# EAGLE board Demux (2) (EAGLE 7.7.0)
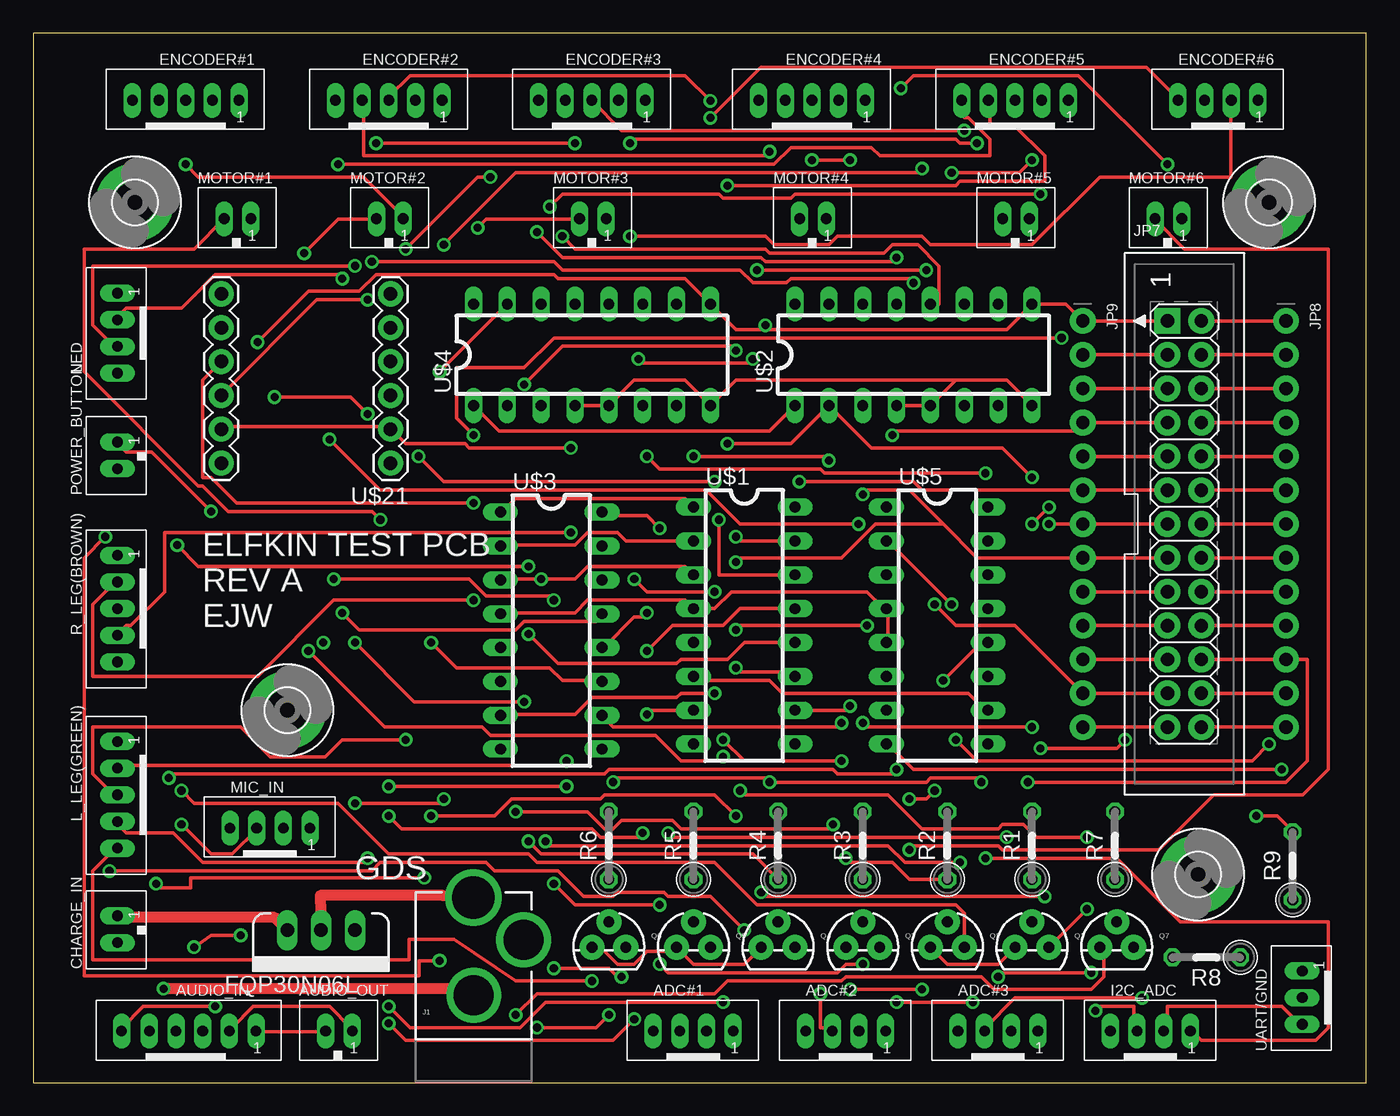
[diagram p0: board, top side]
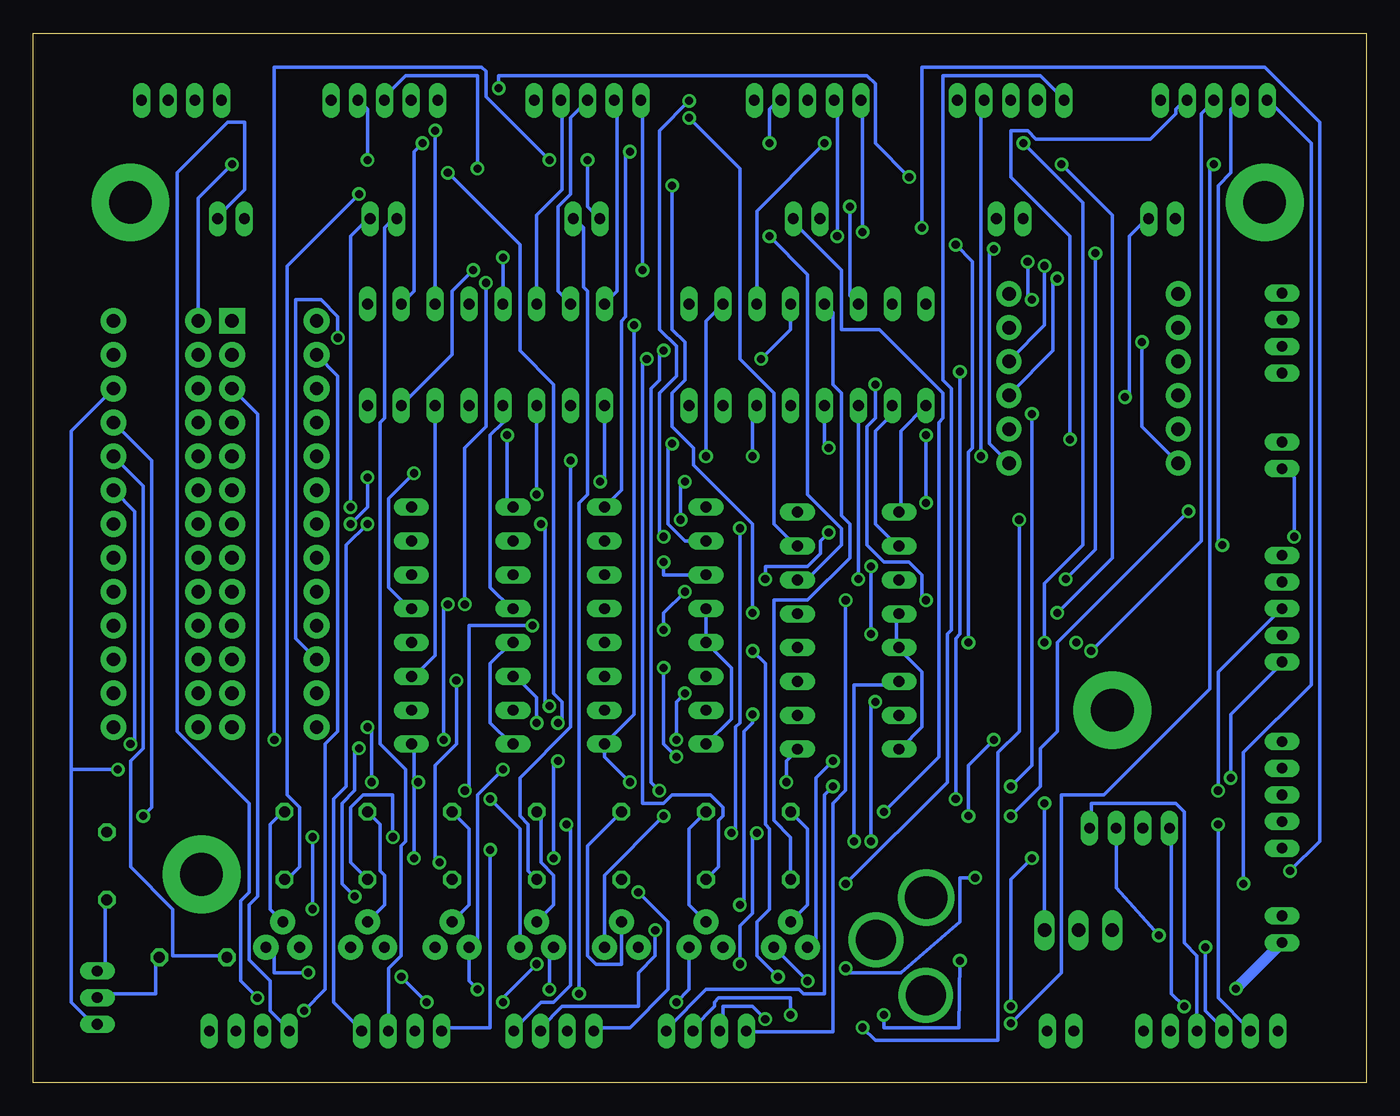
[diagram p1: board, bottom side, seen from below]

Size 100 x 78.73 mm. Coordinates in mm from the lower left corner, seen from the top.
Outline: 0,0 100,0 100,78.73 0,78.73 0,0
Copper layers (1*16): Top 0.035mm / dielectric 1.5mm / Bottom 0.035mm
Design rules "default *": minimum track width 10mil, minimum drill 24mil, track to track 8mil, track to pad 8mil, pad to pad 8mil, via to via 8mil, smd to smd 8mil, copper to edge 80mil, drill to drill 8mil, minimum pad ring 10mil, minimum via ring 8mil, stop-mask expansion 4mil, vias tented up to drill 0mil, thermal gap 10mil

## Footprints (pad centres in the part's own frame; a part is rotated, then mirrored left to right if it is on the bottom)
JST_B4B-PH_HEADER = drill 0.8 long: P1 2.98,0.048; P2 0.98,0.048; P3 -1.02,0.048; P4 -3.02,0.048
JST_B6B-PH_HEADER = drill 0.8 long: P1 4,0.048; P2 2,0.048; P3 0,0.048; P4 -2,0.048; P5 -4,0.048; P6 -6.076,0.048
JST_B2B-PH_HEADER = drill 0.8 long: P1 1.075,0.048; P2 -0.925,0.048
JST_B5B-PH_HEADER = drill 0.8 long: P1 4,0.048; P2 2,0.048; P3 0,0.048; P4 -2,0.048; P5 -4,0.048
TO220V = drill 1.016 long: 1 -2.54,0; 2 0,0; 3 2.54,0
3,2-PAD = drill 3.2 pad 5.842: B3,2 0,0
POWER_JACK_PTH_LOCK = drill 2.997 pad 4.115: GND 0.025,6.557; GNDBREAK 3.762,10.7 | drill 3.2 pad 4.115: PWR 0,13.878
RASBERRYPI_IDC = drill 1 pad 1.93 square: 1 -1.27,15.24 | drill 1 pad 1.93: 2 1.27,15.24; 3 -1.27,12.7; 4 1.27,12.7; 5 -1.27,10.16; 6 1.27,10.16; 7 -1.27,7.62; 8 1.27,7.62; 9 -1.27,5.08; 10 1.27,5.08; 11 -1.27,2.54; 12 1.27,2.54; 13 -1.27,0; 14 1.27,0; 15 -1.27,-2.54; 16 1.27,-2.54; 17 -1.27,-5.08; 18 1.27,-5.08; 19 -1.27,-7.62; 20 1.27,-7.62; 21 -1.27,-10.16; 22 1.27,-10.16; 23 -1.27,-12.7; 24 1.27,-12.7; 25 -1.27,-15.24; 26 1.27,-15.24
1X13_ROUND_76MIL = drill 1 pad 1.93: 1 -15.24,0; 2 -12.7,0; 3 -10.16,0; 4 -7.62,0; 5 -5.08,0; 6 -2.54,0; 7 0,0; 8 2.54,0; 9 5.08,0; 10 7.62,0; 11 10.16,0; 12 12.7,0; 13 15.24,0
TO-92 = drill 0.813 pad 1.88: 1 -1.27,0; 2 0,1.905; 3 1.27,0
0207/5V = drill 0.813 octagon: 1 -2.54,0; 2 2.54,0
DIL16 = drill 0.813 long: 1 -8.89,-3.81; 2 -6.35,-3.81; 3 -3.81,-3.81; 4 -1.27,-3.81; 5 1.27,-3.81; 6 3.81,-3.81; 7 6.35,-3.81; 8 8.89,-3.81; 9 8.89,3.81; 10 6.35,3.81; 11 3.81,3.81; 12 1.27,3.81; 13 -1.27,3.81; 14 -3.81,3.81; 15 -6.35,3.81; 16 -8.89,3.81
LEVEL_SHIFTER = drill 1.016 pad 1.88: 1 6.35,7.62; 2 6.35,5.08; 3 6.35,2.54; 4 6.35,0; 5 6.35,-2.54; 6 6.35,-5.08; 7 -6.35,7.62; 8 -6.35,5.08; 9 -6.35,2.54; 10 -6.35,0; 11 -6.35,-2.54; 12 -6.35,-5.08
JST_B3B-PH_HEADER = drill 0.8 long: P1 2.027,0.048; P2 0.028,0.048; P3 -1.972,0.048

## Placement (x,y rotation side)
ADC#1  JST-PH_4-PIN_HEADER  [JST_B4B-PH_HEADER]  49.53,3.81 0 top
ADC#2  JST-PH_4-PIN_HEADER  [JST_B4B-PH_HEADER]  60.96,3.81 0 top
ADC#3  JST-PH_4-PIN_HEADER  [JST_B4B-PH_HEADER]  72.39,3.81 0 top
AUDIO_IN  JST-PH-6-PIN_HEADERJST_B6B-PH_HEADER  [JST_B6B-PH_HEADER]  12.7,3.81 0 top
AUDIO_OUT  JST-PH_2-PIN_HEADER  [JST_B2B-PH_HEADER]  22.86,3.81 0 top
CHARGE_IN  JST-PH_2-PIN_HEADER  [JST_B2B-PH_HEADER]  6.35,11.43 90 top
ENCODER#1  JST-PH_5-PIN_HEADER  [JST_B5B-PH_HEADER]  11.43,73.66 0 top
ENCODER#2  JST-PH_5-PIN_HEADER  [JST_B5B-PH_HEADER]  26.67,73.66 0 top
ENCODER#3  JST-PH_5-PIN_HEADER  [JST_B5B-PH_HEADER]  41.91,73.66 0 top
ENCODER#4  JST-PH_5-PIN_HEADER  [JST_B5B-PH_HEADER]  58.42,73.66 0 top
ENCODER#5  JST-PH_5-PIN_HEADER  [JST_B5B-PH_HEADER]  73.66,73.66 0 top
ENCODER#6  JST-PH_4-PIN_HEADER  [JST_B4B-PH_HEADER]  88.9,73.66 0 top
FQP30N06L  MOSFET-NCHANNELFQP30N06L  [TO220V]  21.59,11.43 180 top
FRAME1  FRAME-LETTER  [CREATIVE_COMMONS]  -101.6,0 0 top  (outside the outline)
H1  MOUNT-PAD-ROUND3.2  [3,2-PAD]  19.05,27.94 0 top
H2  MOUNT-PAD-ROUND3.2  [3,2-PAD]  87.38,15.62 0 top
H3  MOUNT-PAD-ROUND3.2  [3,2-PAD]  7.62,66.04 0 top
H4  MOUNT-PAD-ROUND3.2  [3,2-PAD]  92.71,66.04 0 top
I2C_ADC  JST-PH_4-PIN_HEADER  [JST_B4B-PH_HEADER]  83.82,3.81 0 top
J1  POWER_JACKPTH_LOCK  [POWER_JACK_PTH_LOCK]  33.02,0 0 top
JP7  PI  [RASBERRYPI_IDC]  86.36,41.91 0 top
JP8  Right  [1X13_ROUND_76MIL]  93.98,41.91 270 top
JP9  Left  [1X13_ROUND_76MIL]  78.74,41.91 270 top
L_LEG(GREEN)  JST-PH_5-PIN_HEADER  [JST_B5B-PH_HEADER]  6.35,21.59 90 top
LED  JST-PH_4-PIN_HEADER  [JST_B4B-PH_HEADER]  6.35,56.26 90 top
MIC_IN  JST-PH_4-PIN_HEADER  [JST_B4B-PH_HEADER]  17.78,19.05 0 top
MOTOR#1  JST-PH_2-PIN_HEADER  [JST_B2B-PH_HEADER]  15.24,64.77 0 top
MOTOR#2  JST-PH_2-PIN_HEADER  [JST_B2B-PH_HEADER]  26.67,64.77 0 top
MOTOR#3  JST-PH_2-PIN_HEADER  [JST_B2B-PH_HEADER]  41.91,64.77 0 top
MOTOR#4  JST-PH_2-PIN_HEADER  [JST_B2B-PH_HEADER]  58.42,64.77 0 top
MOTOR#5  JST-PH_2-PIN_HEADER  [JST_B2B-PH_HEADER]  73.66,64.77 0 top
MOTOR#6  JST-PH_2-PIN_HEADER  [JST_B2B-PH_HEADER]  85.09,64.77 0 top
POWER_BUTTON  JST-PH_2-PIN_HEADER  [JST_B2B-PH_HEADER]  6.35,46.99 90 top
Q1  [TO-92]  74.93,10.16 0 top
Q2  [TO-92]  68.58,10.16 0 top
Q3  [TO-92]  62.23,10.16 0 top
Q4  [TO-92]  55.88,10.16 0 top
Q5  [TO-92]  49.53,10.16 0 top
Q6  [TO-92]  43.18,10.16 0 top
Q7  [TO-92]  81.28,10.16 0 top
R1  1k  [0207/5V]  74.93,17.78 90 top
R2  1k  [0207/5V]  68.58,17.78 90 top
R3  1k  [0207/5V]  62.23,17.78 90 top
R4  1k  [0207/5V]  55.88,17.78 90 top
R5  1k  [0207/5V]  49.53,17.78 90 top
R6  1k  [0207/5V]  43.18,17.78 90 top
R7  [0207/5V]  81.15,17.78 90 top
R8  2.2k  [0207/5V]  88.01,9.4 180 top
R9  2.2k  [0207/5V]  94.49,16.26 90 top
R_LEG(BROWN)  JST-PH_5-PIN_HEADER  [JST_B5B-PH_HEADER]  6.35,35.56 90 top
U$1  74LVC138ADDIL16  [DIL16]  53.34,34.29 270 top
U$2  74LVC138ADDIL16  [DIL16]  66.04,54.61 0 top
U$3  74LVC138ADDIL16  [DIL16]  38.86,33.91 270 top
U$4  74LVC138ADDIL16  [DIL16]  41.91,54.61 0 top
U$5  74LVC138ADDIL16  [DIL16]  67.82,34.29 270 top
U$21  LEVEL_SHIFTER  [LEVEL_SHIFTER]  20.45,54.1 180 top
UART/GND  JST-PH_3-PIN_HEADER  [JST_B3B-PH_HEADER]  95.25,6.35 90 top

## Library data of the parts
ADC#1-ADC#3 AUDIO_OUT CHARGE_IN ENCODER#1-ENCODER#6 I2C_ADC L_LEG(GREEN) LED MIC_IN MOTOR#1-MOTOR#6 POWER_BUTTON R_LEG(BROWN) UART/GND = SRG
AUDIO_IN = JST_Connectors
FQP30N06L = SparkFun-DiscreteSemi; PROD_ID: TRANS-10060
FRAME1 = SparkFun-Aesthetics
H1-H4 = holes
J1 = SparkFun-Connectors; PROD_ID: CONN-08197; SF_ID: PRT-00119
JP7-JP9 = microbuilder
Q1-Q7 = SparkFun-DiscreteSemi; PROD_ID: TRANS-08447
R1-R9 = resistor
U$1-U$5 = SparkFun-DigitalIC
U$21 = SparkFun-Connectors

## Nets
3.3V: I2C_ADC.P1 JP7.1 JP9.1 U$1.9 U$2.9 U$3.9 U$4.9 U$5.9 U$21.1
5.0V: JP7.2 JP8.1 U$21.7
GND: I2C_ADC.P2 JP7.6 JP8.3 U$1.4 U$1.5 U$1.8 U$2.4 U$2.5 U$2.8 U$3.4 U$3.5 U$3.8 U$4.4 U$4.5 U$4.8 U$5.4 U$5.5 U$5.8 U$21.2 U$21.8 UART/GND.P3
N$1: JP7.11 JP9.6 U$1.1 U$2.1 U$3.1 U$4.1
N$2: JP7.13 JP9.7 U$1.2 U$2.2 U$3.2 U$4.2
N$3: JP7.15 JP9.8 U$1.3 U$2.3 U$3.3 U$4.3
N$4: ENCODER#1.P2 U$1.10
N$5: ENCODER#1.P3 U$1.11
N$6: ENCODER#1.P4 U$1.12
N$7: ENCODER#1.P5 U$1.13
N$8: ENCODER#2.P2 U$1.14
N$9: ENCODER#2.P3 U$1.15
N$10: ENCODER#2.P4 U$1.16
N$11: ENCODER#2.P5 U$1.7
N$12: ENCODER#3.P2 U$2.10
N$13: ENCODER#3.P3 U$2.11
N$14: ENCODER#3.P4 U$2.12
N$15: ENCODER#3.P5 U$2.13
N$16: ENCODER#4.P2 U$2.14
N$17: ENCODER#4.P3 U$2.15
N$18: ENCODER#4.P4 U$2.16
N$19: ENCODER#4.P5 U$2.7
N$20: ENCODER#5.P2 U$3.10
N$21: ENCODER#5.P3 U$3.11
N$22: ENCODER#5.P4 U$3.12
N$23: ENCODER#5.P5 U$3.13
N$24: ENCODER#6.P2 U$3.14
N$25: ENCODER#6.P4 U$3.15
N$26: R2.1 U$3.7
N$27: ADC#1.P1 MOTOR#1.P1
N$28: ADC#1.P2 MOTOR#1.P2
N$29: ADC#1.P3 MOTOR#2.P1
N$30: ADC#1.P4 MOTOR#2.P2
N$31: ADC#2.P1 MOTOR#3.P1
N$32: ADC#2.P2 MOTOR#3.P2
N$33: ADC#2.P3 MOTOR#4.P1
N$34: ADC#2.P4 MOTOR#4.P2
N$35: ADC#3.P1 MOTOR#5.P1
N$36: ADC#3.P2 MOTOR#5.P2
N$37: ADC#3.P3 MOTOR#6.P1
N$38: ADC#3.P4 MOTOR#6.P2
N$39: Q1.2 R1.2
N$40: Q3.2 R3.2
N$41: Q2.2 R2.2
N$42: Q4.2 R4.2
N$43: Q5.2 R5.2
N$44: Q6.2 R6.2
N$45: R1.1 U$3.16
N$46: R3.1 U$4.10
N$47: R4.1 U$4.11
N$48: R5.1 U$4.12
N$49: Q1.1 Q2.1 Q3.1 R_LEG(BROWN).P5
N$50: R6.1 U$4.13
N$51: AUDIO_IN.P3 MIC_IN.P1
N$52: I2C_ADC.P4 JP7.5 JP9.3
N$53: JP7.7 JP9.4 U$5.1
N$54: JP7.9 JP9.5
N$55: L_LEG(GREEN).P2 Q4.1 Q5.1 Q6.1
N$56: L_LEG(GREEN).P3 Q4.3
N$57: Q1.3 R_LEG(BROWN).P2
N$58: JP7.17 JP9.9
N$59: JP7.19 JP9.10
N$60: JP7.18 JP8.9
N$61: JP7.23 JP9.12 U$21.3
N$62: JP7.25 JP9.13
N$63: JP7.4 JP8.2
N$64: Q2.3 R_LEG(BROWN).P3
N$65: JP7.10 JP8.5 R8.2
N$66: JP7.12 JP8.6 U$5.2
N$67: JP7.14 JP8.7
N$68: JP7.16 JP8.8
N$70: JP7.20 JP8.10
N$71: JP7.22 JP8.11 U$5.6
N$72: JP7.24 JP8.12
N$73: JP7.26 JP8.13
N$74: L_LEG(GREEN).P4 Q5.3
N$75: L_LEG(GREEN).P5 Q6.3
N$76: I2C_ADC.P3 JP7.3 JP9.2
N$77: AUDIO_IN.P4 MIC_IN.P2
N$78: Q7.2 R7.2
N$79: POWER_BUTTON.P1 Q7.3
N$80: POWER_BUTTON.P2 Q7.1
N$81: R7.1 U$4.14
N$82: CHARGE_IN.P2 J1.GND
N$83: FQP30N06L.2 J1.PWR
N$84: FQP30N06L.1 U$4.15
N$85: AUDIO_IN.P2 AUDIO_OUT.P1
N$86: AUDIO_IN.P1 AUDIO_OUT.P2
N$87: U$1.6 U$5.10
N$88: U$2.6 U$5.11
N$89: U$3.6 U$5.12
N$90: Q3.3 R_LEG(BROWN).P4
N$91: U$4.6 U$5.13
N$92: JP7.8 JP8.4 R9.2
N$93: AUDIO_IN.P5 MIC_IN.P3
N$94: AUDIO_IN.P6 MIC_IN.P4
N$95: LED.P2 U$21.9
N$96: LED.P3 U$21.10
N$97: R8.1 UART/GND.P2
N$98: R9.1 UART/GND.P1
N$100: JP7.21 JP9.11 U$21.4
V_IN+: CHARGE_IN.P1 FQP30N06L.3

## Tracks (layer width: path | path; a pad name or v marks a point on that pad's centre or on a via)
3.3V  (via drill 0.61)
  Top 0.254: v43.5,22.54 43.81,22.86 54.93,22.86 v55.24,22.54 66.99,22.54 67.31,22.86 70.8,22.86 v71.12,22.54 | v71.44,16.83 81.28,16.83 86.04,12.07 97.16,12.07 97.16,4.13 96.2,3.18 87.63,3.18 87,3.81 I2C_ADC.P1 | 54.93,56.51 73.03,56.51 U$2.9 77.47,58.42 JP9.1 JP7.1 | 54.93,56.51 52.7,56.51 U$4.9 48.9,60.32 39.37,60.32 39.05,60.64 25.72,60.64 24.45,59.37 20.64,59.37 v16.83,55.56 | 54.93,56.51 v54.93,56.83
  Bottom 0.254: v43.5,22.54 43.5,24.13 42.86,24.77 U$3.9 | v55.24,22.54 57.15,24.45 U$1.9 54.93,27.62 v54.93,56.83 | 71.44,22.54 71.44,25.4 U$5.9 | 71.44,22.54 v71.44,16.83 | 71.44,22.54 v71.12,22.54 | U$21.1 16.83,49.21 v16.83,55.56
5.0V  (via drill 0.61)
  Top 0.254: v27.94,62.55 33.34,67.95 v34.29,67.95 | v65.09,74.61 66.04,75.56 78.42,75.56 v85.09,68.9 | JP7.2 JP8.1
  Bottom 0.254: U$21.7 28.26,47.94 28.26,62.23 v27.94,62.55 | v34.29,67.95 36.83,70.48 36.83,74.93 37.47,75.56 65.09,75.56 v65.09,74.61 | v85.09,68.9 87.63,66.36 JP7.2
GND  (via drill 0.61)
  Top 0.254: JP8.3 JP7.6 | I2C_ADC.P2 85.09,4.13 85.09,5.71 93.66,5.71 94.93,4.45 UART/GND.P3 | U$5.5 64.14,33.02 64.14,35.56 U$5.4 63.82,35.56 62.55,36.83 52.39,36.83 51.12,35.56 U$1.4 48.9,36.2 41.59,36.2 40.64,35.24 35.24,35.24 U$3.4 | U$21.2 14.29,49.21 26.67,49.21 U$21.8 26.99,48.89 27.94,47.94 32.38,47.94 32.7,47.62 v40.32,47.62 | U$4.4 U$4.5 45.09,52.7 48.9,52.7 U$4.8 52.7,52.7 69.22,52.7 | U$2.4 U$2.5 69.22,52.7 | U$2.8 73.03,52.7 69.22,52.7 | v93.66,23.5 66.04,23.5 64.14,25.4 U$5.8
  Bottom 0.254: JP8.3 97.16,48.89 97.16,23.5 | 97.16,23.5 97.16,6.03 95.25,4.13 UART/GND.P3 | U$5.8 64.14,25.4 65.72,26.99 65.72,31.43 64.14,33.02 U$5.5 | U$3.8 34.92,25.08 33.34,26.67 33.34,30.8 34.92,32.38 U$3.5 35.24,32.7 35.24,34.92 U$3.4 | U$1.8 47.62,27.3 47.62,31.11 U$1.5 U$1.4 | v40.32,47.62 40.64,47.94 U$4.4 | U$2.4 64.77,49.53 65.72,48.58 65.72,37.15 64.14,35.56 U$5.4 | v93.66,23.5 97.16,23.5
N$1  (via drill 0.61)
  Top 0.254: JP7.11 JP9.6 66.67,44.45 66.04,45.08 v57.47,45.08 | U$1.1 48.9,43.81 36.2,43.81 35.24,42.86 U$3.1 | U$2.1 55.24,48.89 34.92,48.89 U$4.1
  Bottom 0.254: U$4.1 34.92,48.89 34.92,42.86 U$3.1 | v57.47,45.08 57.15,45.4 U$2.1
N$2  (via drill 0.61)
  Top 0.254: JP7.13 JP9.7 v76.2,41.91 | U$1.2 44.45,40.64 43.81,41.27 41.59,41.27 40.64,40.32 35.24,40.32 U$3.2 | v52.07,47.94 56.83,47.94 U$2.2 62.87,47.62 72.71,47.62 v74.93,45.4
  Bottom 0.254: U$4.2 35.56,50.16 36.83,48.89 36.83,41.91 35.24,40.32 U$3.2 | v52.07,47.94 52.39,47.62 52.39,41.91 51.12,40.64 U$1.2 | v76.2,41.91 74.93,43.18 v74.93,45.4
N$3  (via drill 0.61)
  Top 0.254: U$1.3 48.9,38.73 41.59,38.73 40.64,37.78 v38.1,37.78 35.24,37.78 U$3.3 | v62.23,44.13 62.55,44.45 65.72,44.45 68.26,41.91 | 68.26,41.91 70.8,39.37 JP9.8 JP7.15 | v52.7,39.05 53.02,39.37 60.64,39.37 63.18,41.91 68.26,41.91
  Bottom 0.254: v38.1,37.78 U$4.3 | v62.23,44.13 U$2.3 | U$1.3 52.7,38.1 v52.7,39.05
N$4  (via drill 0.61)
  Top 0.254: v22.23,48.26 26.04,44.45 50.48,44.45 53.02,41.91 v61.91,41.91 | v61.28,28.26 60.96,27.94 U$1.10
  Bottom 0.254: v22.23,48.26 22.23,63.5 26.67,67.95 26.67,71.44 25.4,71.44 24.77,70.8 16.19,70.8 14.29,72.71 14.29,73.03 13.65,73.66 ENCODER#1.P2 | v61.91,41.91 61.59,41.59 61.59,28.57 v61.28,28.26
N$5  (via drill 0.61)
  Top 0.254: v20.64,32.38 26.35,26.67 33.66,26.67 34.29,26.04 46.67,26.04 48.58,24.13 51.44,24.13 v51.75,24.45 | v52.7,31.11 53.02,30.8 56.83,30.8 U$1.11
  Bottom 0.254: v20.64,32.38 12.38,40.64 12.38,72.71 11.43,73.66 ENCODER#1.P3 | v51.75,24.45 52.7,25.4 v52.7,31.11
N$6  (via drill 0.61)
  Top 0.254: v10.79,40.32 12.38,38.73 v37.15,38.73 | v37.15,33.65 39.37,31.43 48.26,31.43 48.58,31.75 52.07,31.75 53.34,33.02 U$1.12
  Bottom 0.254: v10.79,40.32 11.11,40.64 11.11,67.31 10.16,68.26 10.16,73.03 9.53,73.66 ENCODER#1.P4 | v37.15,33.65 v37.15,38.73
N$7  (via drill 0.61)
  Top 0.254: v9.21,14.92 9.53,14.61 11.81,14.61 11.81,15.37 v29.34,15.37 | v39.05,8.57 43.18,8.57 43.81,7.94 v44.13,7.94 | v46.04,32.38 47.94,34.29 51.75,34.29 53.02,35.56 U$1.13
  Bottom 0.254: v9.21,14.92 9.21,24.77 4.13,29.84 4.13,70.48 7.3,73.66 ENCODER#1.P5 | v29.34,15.37 30.48,15.37 30.48,12.07 34.92,8.26 39.05,8.26 v39.05,8.57 | v44.13,7.94 45.72,9.53 45.72,12.07 44.77,13.02 44.77,19.05 45.09,19.37 45.09,31.43 v46.04,32.38
N$8  (via drill 0.61)
  Top 0.254: v28.89,46.99 30.8,45.08 v51.12,45.08 | v51.44,42.23 51.44,38.1 U$1.14
  Bottom 0.254: v28.89,46.99 28.89,73.66 ENCODER#2.P2 | v51.12,45.08 51.44,44.77 v51.44,42.23
N$9  (via drill 0.61)
  Top 0.254: v50.8,73.66 48.9,75.56 28.26,75.56 26.67,73.98 ENCODER#2.P3 | v52.7,40.96 53.02,40.64 U$1.15
  Bottom 0.254: v50.8,73.66 53.02,71.44 53.02,56.51 51.75,55.24 51.75,53.02 53.02,51.75 53.02,41.27 v52.7,40.96
N$10  (via drill 0.61)
  Top 0.254: v55.24,69.85 54.93,69.53 24.77,69.53 24.77,73.66 ENCODER#2.P4
  Bottom 0.254: v55.24,69.85 55.56,69.53 55.56,57.47 55.88,57.15 55.88,44.45 U$1.16
N$11  (via drill 0.61)
  Top 0.254: v39.05,14.92 40.64,13.34 v46.99,13.34 | v46.04,27.62 46.35,27.94 U$1.7
  Bottom 0.254: v39.05,14.92 31.43,22.54 31.43,33.65 31.11,33.97 31.11,52.07 31.75,52.7 31.75,75.56 24.45,75.56 22.86,73.98 ENCODER#2.P5 | v46.99,13.34 46.67,13.65 46.67,26.35 46.04,26.99 v46.04,27.62
N$12  (via drill 0.61)
  Top 0.254: v44.77,70.48 45.09,70.8 69.22,70.8 69.53,70.48 v70.8,70.48
  Bottom 0.254: v44.77,70.48 44.77,73.03 44.13,73.66 ENCODER#3.P2 | v70.8,70.48 71.44,69.85 71.44,59.37 U$2.10
N$13  (via drill 0.61)
  Top 0.254: v69.85,71.44 44.13,71.44 41.91,73.66 ENCODER#3.P3
  Bottom 0.254: U$2.11 v69.85,71.44
N$14  (via drill 0.61)
  Top 0.254: v39.69,63.5 40.64,62.55 54.93,62.55 55.24,62.23 63.82,62.23 64.45,62.87 66.36,62.87 67.94,61.28 67.94,58.42 U$2.12
  Bottom 0.254: v39.69,63.5 39.69,73.66 ENCODER#3.P4
N$15  (via drill 0.61)
  Top 0.254: v37.78,63.82 39.69,61.91 54.61,61.91 54.93,61.59 64.45,61.59 v64.77,61.91
  Bottom 0.254: v37.78,63.82 37.78,73.66 ENCODER#3.P5 | U$2.13 v64.77,61.91
N$16
  Bottom 0.254: U$2.14 62.23,65.09 60.33,66.99 60.33,73.66 ENCODER#4.P2
N$17
  Bottom 0.254: U$2.15 60.64,59.37 60.64,65.72 59.69,66.67 59.69,72.39 58.42,73.66 ENCODER#4.P3
N$18
  Bottom 0.254: U$2.16 56.2,59.37 56.2,73.66 ENCODER#4.P4
N$19  (via drill 0.61)
  Top 0.254: v66.99,60.96 v54.29,60.96
  Bottom 0.254: v54.29,60.96 54.29,73.66 ENCODER#4.P5 | v66.99,60.96 68.58,59.37 68.58,54.61 U$2.7
N$20  (via drill 0.61)
  Top 0.254: v74.93,69.22 73.98,68.26 v68.9,68.26 | v60.64,26.99 60.33,26.67 43.5,26.67 42.86,27.3 U$3.10
  Bottom 0.254: v74.93,69.22 74.93,73.03 75.56,73.66 ENCODER#5.P2 | v68.9,68.26 63.5,62.87 63.5,54.93 60.96,52.39 60.96,29.21 60.33,28.57 60.33,27.3 v60.64,26.99
N$21  (via drill 0.61)
  Top 0.254: v66.67,68.58 66.36,68.26 36.2,68.26 v30.8,62.87 | v29.84,33.02 31.75,31.11 38.73,31.11 39.69,30.16 42.55,30.16 U$3.11
  Bottom 0.254: v66.67,68.58 66.67,75.56 72.07,75.56 73.66,73.98 ENCODER#5.P3 | v30.8,62.87 29.53,61.59 29.53,47.62 29.84,47.31 v29.84,33.02
N$22  (via drill 0.61)
  Top 0.254: v52.07,67.31 69.22,67.31 69.53,67.63 75.88,67.63 75.88,69.53 73.66,71.76 71.75,71.76 71.75,73.66 ENCODER#5.P4 | v46.04,35.24 45.72,34.92 45.09,34.92 42.86,32.7 U$3.12
  Bottom 0.254: v52.07,67.31 52.07,56.51 51.12,55.56 51.12,52.7 52.07,51.75 52.07,49.21 50.48,47.62 50.48,46.35 46.04,41.91 v46.04,35.24
N$23  (via drill 0.61)
  Top 0.254: v22.86,68.9 55.56,68.9 56.83,70.17 62.87,70.17 63.5,69.53 71.75,69.53 71.75,70.8 70.17,72.39 69.85,72.39 69.85,73.66 ENCODER#5.P5 | v23.18,35.24 24.45,33.97 36.2,33.97 36.83,34.61 42.23,34.61 42.55,34.92 U$3.13
  Bottom 0.254: v22.86,68.9 19.05,65.09 19.05,39.37 v23.18,35.24
N$24  (via drill 0.61)
  Top 0.254: v44.77,63.5 54.93,63.5 55.56,62.87 59.69,62.87 60.33,63.5 66.67,63.5 67.31,62.87 74.93,62.87 80.01,67.95 89.85,67.95 89.85,73.66 ENCODER#6.P2
  Bottom 0.254: v44.77,63.5 41.91,60.64 41.91,44.13 39.37,41.59 39.37,40.32 41.91,37.78 42.55,37.78 U$3.14
N$25  (via drill 0.61)
  Top 0.254: v50.8,72.39 54.61,76.2 83.5,76.2 85.72,73.98 ENCODER#6.P4
  Bottom 0.254: v50.8,72.39 46.99,68.58 46.99,54.29 44.45,51.75 44.45,41.91 42.86,40.32 U$3.15
N$26  (via drill 0.61)
  Top 0.254: v51.12,29.21 48.58,29.21 48.26,28.89 41.91,28.89 40.64,27.62 35.24,27.62 U$3.7 | v51.75,25.72 53.34,24.13 v60.64,24.13 | v60.96,16.83 61.28,16.51 64.45,16.51 65.72,15.24 R2.1
  Bottom 0.254: v51.12,29.21 51.75,28.57 v51.75,25.72 | v60.64,24.13 60.96,23.81 v60.96,16.83
N$27  (via drill 0.61)
  Top 0.254: v26.67,22.23 v40.01,22.23 | v25.08,50.16 23.81,51.43 v18.1,51.43
  Bottom 0.254: v40.01,22.23 40.64,21.59 40.64,6.67 42.23,6.67 42.55,6.99 49.53,6.99 52.39,4.13 ADC#1.P1 | v26.67,22.23 25.08,23.81 v25.08,50.16 | v18.1,51.43 17.78,51.75 17.78,63.5 16.51,64.77 MOTOR#1.P1
N$28  (via drill 0.61)
  Top 0.254: v43.18,5.08 42.23,4.13 v37.78,4.13 | v26.04,42.23 25.4,42.86 14.61,42.86 12.7,44.77 12.38,44.77 3.81,53.34 3.81,62.55 12.06,62.55 14.29,64.77 MOTOR#1.P2
  Bottom 0.254: v43.18,5.08 43.18,6.35 48.58,6.35 48.9,6.03 48.9,5.71 50.48,4.13 ADC#1.P2 | v37.78,4.13 36.83,3.18 27.62,3.18 27.62,24.77 26.04,26.35 v26.04,42.23
N$29  (via drill 0.61)
  Top 0.254: v11.43,68.9 12.38,67.95 24.77,67.95 27.62,65.09 MOTOR#2.P1 | v26.67,4.45 27.94,3.18 43.5,3.18 v45.09,4.76
  Bottom 0.254: v11.43,68.9 11.75,68.58 11.75,29.53 19.68,21.59 22.86,21.59 22.86,8.26 v26.67,4.45 | v45.09,4.76 46.04,5.71 48.26,5.71 48.26,4.13 ADC#1.P3
N$30  (via drill 0.61)
  Top 0.254: v39.05,36.2 38.73,36.51 33.97,36.51 32.7,37.78 v22.54,37.78 | v20.32,62.23 22.86,64.77 25.72,64.77 MOTOR#2.P2
  Bottom 0.254: v39.05,36.2 39.05,21.91 40.01,20.96 40.01,3.81 46.35,3.81 ADC#1.P4 | v22.54,37.78 20.32,40 v20.32,62.23
N$31  (via drill 0.61)
  Top 0.254: v60.01,19.37 59.69,19.05 48.58,19.05 47.94,19.68 44.13,19.68 43.5,19.05 42.86,19.05 41.59,20.32 v36.2,20.32
  Bottom 0.254: v60.01,19.37 59.69,19.05 59.69,7.3 60.96,6.03 61.91,6.03 63.82,4.13 ADC#2.P1 | v36.2,20.32 32.07,24.45 32.07,49.53 31.75,49.85 31.75,51.75 36.51,56.51 39.37,56.51 39.37,60.96 42.86,64.45 42.86,64.77 MOTOR#3.P1
N$32  (via drill 0.61)
  Top 0.254: v53.34,11.43 50.8,13.97 47.62,13.97 47.31,14.29 43.81,14.29 43.5,13.97 41.27,13.97 39.37,15.88 34.61,15.88 33.97,16.51 26.04,16.51 25.4,15.88 v5.71,15.88 | v33.34,64.14 33.97,64.77 40.96,64.77 MOTOR#3.P2
  Bottom 0.254: v53.34,11.43 53.34,9.53 54.61,8.26 54.61,5.71 60.33,5.71 61.91,4.13 ADC#2.P2 | v5.71,15.88 3.49,18.1 3.49,72.07 7.62,76.2 33.34,76.2 v33.34,64.14
N$33  (via drill 0.61)
  Top 0.254: v59.05,6.67 59.05,4.13 59.69,4.13 ADC#2.P3
  Bottom 0.254: v59.05,6.67 59.05,43.5 58.42,44.13 58.42,59.37 58.74,59.69 58.74,64.14 59.37,64.77 MOTOR#4.P1
N$34  (via drill 0.61)
  Top 0.254: v61.28,69.22 v58.42,69.22 | v81.92,25.72 81.28,25.08 v75.56,25.08 | v75.88,13.97 54.93,13.97 v54.61,14.29
  Bottom 0.254: v58.42,69.22 58.42,65.72 57.78,65.09 MOTOR#4.P2 | v61.28,69.22 66.04,73.98 66.04,75.88 66.36,76.2 81.92,76.2 v81.92,25.72 | v75.56,25.08 75.88,24.77 75.88,21.91 76.83,20.96 76.83,14.92 v75.88,13.97 | v54.61,14.29 52.39,12.07 52.39,6.99 55.24,4.13 57.78,4.13 ADC#2.P4
N$35  (via drill 0.61)
  Top 0.254: v74.93,41.91 v76.2,43.18
  Bottom 0.254: v76.2,43.18 76.2,63.5 74.93,64.77 MOTOR#5.P1 | v74.93,41.91 76.52,40.32 76.52,22.23 77.47,21.27 77.47,6.03 75.56,4.13 ADC#3.P1
N$36
  Bottom 0.254: ADC#3.P2 73.34,4.13 73.34,8.57 72.39,9.53 72.39,17.78 72.07,18.1 72.07,23.5 73.98,25.4 73.98,49.53 73.66,49.85 73.66,64.14 73.03,64.77 MOTOR#5.P2
N$37  (via drill 0.61)
  Top 0.254: v83.19,6.35 73.66,6.35 71.44,4.13 ADC#3.P3
  Bottom 0.254: v83.19,6.35 84.45,7.62 84.45,13.65 83.82,14.29 83.82,20.96 89.22,26.35 89.22,68.26 85.41,72.07 84.14,72.07 84.14,66.99 86.04,65.09 MOTOR#6.P1
N$38  (via drill 0.61)
  Top 0.254: v65.72,17.46 66.04,17.78 72.39,17.78 72.71,17.46 84.45,17.46 88.58,21.59 95.25,21.59 97.16,23.5 97.16,62.55 86.36,62.55 84.14,64.77 MOTOR#6.P2
  Bottom 0.254: v65.72,17.46 65.72,4.13 69.22,4.13 ADC#3.P4
N$39
  Bottom 0.254: R1.2 73.98,19.37 73.98,15.88 73.66,15.56 73.66,13.34 Q1.2
N$40
  Bottom 0.254: R3.2 61.91,20 61.91,16.51 60.96,15.56 60.96,13.34 Q3.2
N$41
  Bottom 0.254: R2.2 67.31,19.05 67.31,13.34 Q2.2
N$42
  Bottom 0.254: R4.2 58.42,17.78 58.42,9.53 57.78,8.89 55.88,8.89 Q4.2
N$43
  Bottom 0.254: R5.2 50.8,19.05 50.8,13.34 Q5.2
N$44
  Bottom 0.254: R6.2 41.91,19.05 41.91,13.34 Q6.2
N$45  (via drill 0.61)
  Top 0.254: v73.03,18.41 47.94,18.41 v47.62,18.73 | v46.99,41.59 46.04,42.54 42.86,42.54 U$3.16
  Bottom 0.254: R1.1 76.2,16.51 76.2,20.64 75.25,21.59 73.03,21.59 v73.03,18.41 | v47.62,18.73 47.31,19.05 47.31,26.67 46.99,26.99 v46.99,41.59
N$46  (via drill 0.61)
  Top 0.254: v59.69,46.67 59.37,46.99 v49.53,46.99
  Bottom 0.254: R3.1 62.87,15.88 62.87,19.37 63.5,20 63.5,22.86 59.69,26.67 v59.69,46.67 | v49.53,46.99 49.53,57.15 U$4.10
N$47  (via drill 0.61)
  Top 0.254: v25.72,70.48 v40.64,70.48 | v24.13,33.02 28.57,28.57 v36.83,28.57 | v37.15,18.1 38.1,17.14 53.98,17.14 R4.1
  Bottom 0.254: U$4.11 45.72,65.41 v40.64,70.48 | v25.72,70.48 21.27,66.04 21.27,40.32 24.13,37.46 v24.13,33.02 | v36.83,28.57 37.15,28.26 v37.15,18.1
N$48  (via drill 0.61)
  Top 0.254: v53.98,54.29 53.66,53.97 45.72,53.97 v45.4,54.29
  Bottom 0.254: R5.1 48.58,16.19 48.58,19.68 48.26,20 48.26,20.64 49.21,21.59 52.07,21.59 52.7,20.96 54.29,20.96 54.29,53.97 v53.98,54.29 | v45.4,54.29 43.18,56.51 U$4.12
N$49  (via drill 0.61)
  Top 0.254: v10.16,22.86 10.48,23.18 42.86,23.18 43.18,23.5 60.01,23.5 60.33,23.18 64.45,23.18 v64.77,23.5 | v66.67,6.99 v61.28,6.99 | Q1.1 72.39,8.89 68.58,8.89 Q2.1
  Bottom 0.254: v10.16,22.86 10.16,27.62 6.35,31.43 R_LEG(BROWN).P5 | v64.77,23.5 66.67,21.59 66.67,10.79 Q2.1 67.31,7.62 v66.67,6.99 | Q3.1 61.28,9.84 v61.28,6.99
N$50
  Bottom 0.254: U$4.13 40.01,57.78 40.01,52.39 39.37,51.75 39.37,42.54 38.73,41.91 38.73,39.37 41.91,36.2 44.45,36.2 44.45,19.68 43.18,18.41 R6.1
N$51
  Bottom 0.254: AUDIO_IN.P3 12.7,9.53 13.65,10.48 13.65,20.32 14.29,20.96 20.64,20.96 20.64,19.37 MIC_IN.P1
N$52
  Top 0.254: JP7.5 JP9.3
  Bottom 0.254: JP7.5 83.19,50.16 83.19,13.97 83.82,13.34 83.82,9.21 82.23,7.62 82.23,5.4 80.96,4.13 I2C_ADC.P4
N$53  (via drill 0.61)
  Top 0.254: v64.45,48.58 64.77,48.89 78.11,48.89 JP9.4 JP7.7
  Bottom 0.254: v64.45,48.58 64.45,43.5 64.14,43.18 U$5.1
N$54
  Top 0.254: JP7.9 JP9.5
N$55  (via drill 0.61)
  Top 0.254: Q4.1 53.34,8.89 49.53,8.89 Q5.1 47.94,9.84 46.04,9.84 45.09,8.89 43.81,8.89 42.55,10.16 Q6.1 | v40.01,24.13 39.69,23.81 6.35,23.81 L_LEG(GREEN).P2
  Bottom 0.254: v40.01,24.13 41.27,22.86 41.27,10.79 Q6.1
N$56  (via drill 0.61)
  Top 0.254: v27.94,25.72 23.18,25.72 21.91,24.45 17.78,24.45 15.56,26.67 4.45,26.67 4.45,23.18 6.03,21.59 L_LEG(GREEN).P3 | v29.84,20 34.61,20 35.88,21.27 42.55,21.27 42.86,21.59 51.12,21.59 v52.7,20
  Bottom 0.254: v27.94,25.72 29.84,23.81 v29.84,20 | v52.7,20 57.15,15.56 Q4.3
N$57  (via drill 0.61)
  Top 0.254: v33.02,36.2 22.54,36.2 16.83,30.48 4.45,30.48 4.45,35.88 6.03,37.46 R_LEG(BROWN).P2 | v36.83,52.39 39.69,55.24 52.39,55.24 v52.7,54.93 | v53.02,21.91 53.34,21.59 64.14,21.59 66.67,19.05 72.39,19.05 72.71,19.37 74.3,19.37 75.25,18.41 v79.06,18.41 | Q1.3 v79.06,13.02
  Bottom 0.254: v33.02,36.2 33.34,36.51 33.34,38.1 34.29,39.05 36.2,39.05 37.47,40.32 37.47,49.21 36.83,49.85 v36.83,52.39 | v52.7,54.93 53.02,54.61 53.02,52.7 53.66,52.07 53.66,22.54 v53.02,21.91 | v79.06,13.02 v79.06,18.41
N$58
  Top 0.254: JP7.17 JP9.9
N$59
  Top 0.254: JP7.19 JP9.10
N$60
  Top 0.254: JP8.9 JP7.18
N$61  (via drill 0.61)
  Top 0.254: U$21.3 21.27,58.74 v25.08,58.74 | v25.4,61.59 39.05,61.59 39.69,60.96 53.02,60.96 53.98,60.01 56.52,60.01 56.83,60.32 65.72,60.32 v66.04,60.01 | v67.63,35.88 69.22,34.29 73.66,34.29 JP9.12 JP7.23
  Bottom 0.254: v25.08,58.74 25.4,59.05 v25.4,61.59 | v66.04,60.01 66.04,49.21 67.63,47.62 v67.63,35.88
N$62
  Top 0.254: JP7.25 JP9.13
N$63
  Top 0.254: JP8.2 JP7.4
N$64  (via drill 0.61)
  Top 0.254: v11.11,21.91 12.06,20.96 22.86,20.96 26.67,17.14 37.15,17.14 37.78,16.51 51.12,16.51 54.29,13.34 69.22,13.34 69.85,12.7 Q2.3
  Bottom 0.254: v11.11,21.91 11.11,30.8 6.35,35.56 R_LEG(BROWN).P3
N$65
  Top 0.254: JP8.5 JP7.10
  Bottom 0.254: JP8.5 91.76,44.77 91.76,25.08 92.71,24.13 92.71,16.19 89.53,13.02 89.53,9.53 85.72,9.53 R8.2
N$66  (via drill 0.61)
  Top 0.254: v68.9,35.88 64.14,40.64 U$5.2 | v69.22,25.72 70.8,24.13 91.44,24.13 v92.71,25.4 | JP8.6 JP7.12
  Bottom 0.254: v68.9,35.88 69.22,35.56 v69.22,25.72 | v92.71,25.4 92.39,25.72 92.39,42.86 JP8.6
N$67
  Top 0.254: JP8.7 JP7.14
N$68
  Top 0.254: JP8.8 JP7.16
N$69  (via drill 0.61)
  other vias: 21.75,33.02
N$70
  Top 0.254: JP8.10 JP7.20
N$71  (via drill 0.61)
  Top 0.254: v62.23,26.99 62.55,26.67 v74.93,26.67 | v74.61,22.54 93.98,22.54 95.57,24.13 95.57,31.75 JP8.11 JP7.22
  Bottom 0.254: v62.23,26.99 62.23,28.89 63.82,30.48 U$5.6 | v74.93,26.67 74.61,26.35 v74.61,22.54
N$72
  Top 0.254: JP8.12 JP7.24
N$73
  Top 0.254: JP8.13 JP7.26
N$74  (via drill 0.61)
  Top 0.254: v25.08,16.83 24.77,16.51 12.7,16.51 10.48,18.73 6.99,18.73 6.35,19.37 L_LEG(GREEN).P4 | v26.67,5.71 28.26,4.13 36.51,4.13 38.42,6.03 v51.75,6.03
  Bottom 0.254: v25.08,16.83 26.67,15.24 v26.67,5.71 | v51.75,6.03 50.8,6.99 Q5.3
N$75  (via drill 0.61)
  Top 0.254: v41.91,7.62 36.2,7.62 31.56,10.73 28.19,10.73 28.19,9.21 4.45,9.21 4.45,15.88 6.03,17.46 L_LEG(GREEN).P5
  Bottom 0.254: Q6.3 v41.91,7.62
N$76  (via drill 0.61)
  Top 0.254: v79.69,5.4 80.01,5.71 82.55,5.71 82.55,4.13 I2C_ADC.P3 | JP9.2 JP7.3
  Bottom 0.254: v79.69,5.4 78.11,6.99 78.11,25.4 77.15,26.35 77.15,53.02 JP9.2
N$77  (via drill 0.61)
  Top 0.254: v12.06,10.16 13.34,11.05 v15.56,11.05
  Bottom 0.254: v12.06,10.16 12.06,5.4 10.79,4.13 AUDIO_IN.P4 | v15.56,11.05 18.73,14.61 18.73,19.05 MIC_IN.P2
N$78
  Bottom 0.254: Q7.2 82.23,13.02 82.23,19.37 81.28,20.32 R7.2
N$79  (via drill 0.61)
  Top 0.254: v13.34,42.86 8.89,47.31 6.99,47.31 6.35,47.94 POWER_BUTTON.P1 | v26.67,20 27.62,19.05 41.91,19.05 42.55,18.41 45.4,18.41 v45.72,18.73 | v46.99,8.89 47.62,8.26 60.33,8.26 60.96,8.89 v62.23,8.89 | v70.48,6.03 v64.77,6.03 | v72.39,7.94 72.71,8.26 v79.38,8.26
  Bottom 0.254: v13.34,42.86 23.18,33.02 23.18,26.35 24.45,25.08 24.45,22.23 v26.67,20 | v45.72,18.73 46.04,18.41 46.04,12.7 46.99,11.75 v46.99,8.89 | v62.23,8.89 64.77,6.35 v64.77,6.03 | v72.39,7.94 v70.48,6.03 | v79.38,8.26 81.92,8.26 81.92,9.53 Q7.3
N$80  (via drill 0.61)
  Top 0.254: v5.4,40.96 3.81,39.37 3.81,8 28.96,8 28.96,9.14 v30.48,9.14 | v36.2,5.08 37.78,6.67 51.12,6.67 52.07,7.62 60.64,7.62 60.96,7.94 71.12,7.94 72.07,6.99 79.38,6.99 80.33,7.94 80.33,10.16 Q7.1
  Bottom 0.254: v5.4,40.96 5.4,45.4 6.03,46.04 POWER_BUTTON.P2 | v30.48,9.14 30.54,4.13 36.2,4.13 v36.2,5.08
N$81  (via drill 0.61)
  Top 0.254: v38.73,65.72 39.69,66.67 51.44,66.67 51.75,66.36 56.83,66.36 57.15,66.67 v75.56,66.67
  Bottom 0.254: U$4.14 38.73,59.05 v38.73,65.72 | v75.56,66.67 80.96,61.28 80.96,21.59 80.01,20.64 80.01,16.19 80.96,15.24 R7.1
N$82  (via drill 0.61)
  Top 0.813: v9.78,7.05 31.88,7.05 J1.GND
  Bottom 0.254: 6.35,10.48 CHARGE_IN.P2
  Bottom 0.813: v9.78,7.05 6.35,10.48
N$83
  Top 0.813: FQP30N06L.2 21.53,14.03 30.73,14.03 J1.PWR
N$84  (via drill 0.61)
  Top 0.254: v30.48,53.34 U$4.15 | v30.8,21.27 30.48,20.96 v24.13,20.96
  Bottom 0.254: v30.48,53.34 30.48,33.65 30.8,33.34 v30.8,21.27 | FQP30N06L.1 v24.13,20.96
N$85
  Top 0.254: AUDIO_IN.P2 14.92,4.13 16.51,5.71 22.23,5.71 23.81,4.13 AUDIO_OUT.P1
N$86
  Top 0.254: AUDIO_IN.P1 16.83,3.81 21.91,3.81 AUDIO_OUT.P2
N$87
  Top 0.254: U$1.6 49.85,30.16 55.24,30.16 56.2,29.21 70.17,29.21 71.44,27.94 U$5.10
N$88
  Bottom 0.254: U$2.6 69.85,32.07 71.44,30.48 U$5.11
N$89  (via drill 0.61)
  Top 0.254: v38.42,18.1 38.73,17.78 64.14,17.78 65.41,16.51 v69.53,16.51 | v68.26,30.16 71.12,33.02 U$5.12
  Bottom 0.254: v38.42,18.1 38.42,29.84 35.24,29.84 U$3.6 | v69.53,16.51 69.85,16.83 69.85,23.81 68.26,25.4 v68.26,30.16
N$90  (via drill 0.61)
  Top 0.254: v40.32,41.27 9.84,41.27 9.84,36.83 7.3,34.29 6.99,34.29 6.35,33.65 R_LEG(BROWN).P4 | v45.09,37.78 46.04,36.83 v51.12,36.83 | v52.7,33.97 53.02,34.29 v62.55,34.29 | v67.63,21.91 66.99,21.27 v65.72,21.27
  Bottom 0.254: v40.32,41.27 40.96,40.64 40.96,39.69 41.91,38.73 45.09,38.73 v45.09,37.78 | v51.12,36.83 52.7,35.24 v52.7,33.97 | v62.55,34.29 67.31,34.29 67.31,22.23 v67.63,21.91 | v65.72,21.27 63.5,19.05 Q3.3
N$91  (via drill 0.61)
  Top 0.254: v46.04,46.99 46.99,46.04 59.05,46.04 59.37,45.72 v71.44,45.72
  Bottom 0.254: U$4.6 46.04,50.48 v46.04,46.99 | v71.44,45.72 73.34,43.81 73.34,37.15 71.75,35.56 U$5.13
N$92  (via drill 0.61)
  Top 0.254: v91.76,20 93.34,20 94.3,19.05 R9.2 | JP8.4 JP7.8
  Bottom 0.254: v91.76,20 91.12,20.64 91.12,46.67 JP8.4
N$93  (via drill 0.61)
  Top 0.254: v11.11,19.37 13.34,17.14 14.92,17.14 16.83,19.05 MIC_IN.P3
  Bottom 0.254: v11.11,19.37 11.11,6.35 8.89,4.13 AUDIO_IN.P5
N$94  (via drill 0.61)
  Top 0.254: v13.65,5.71 8.26,5.71 6.67,4.13 AUDIO_IN.P6
  Bottom 0.254: v13.65,5.71 14.61,6.67 14.61,19.05 MIC_IN.P4
N$95  (via drill 0.61)
  Top 0.254: v23.18,60.32 22.86,60.64 13.65,60.64 11.11,58.1 6.99,58.1 6.35,57.47 LED.P2
  Bottom 0.254: v23.18,60.32 23.5,60.01 23.5,54.93 26.67,51.75 U$21.9
N$96  (via drill 0.61)
  Top 0.254: v24.13,61.28 4.45,61.28 4.45,56.83 6.03,55.24 LED.P3
  Bottom 0.254: v24.13,61.28 24.13,56.83 26.67,54.29 U$21.10
N$97
  Bottom 0.254: UART/GND.P2 94.93,6.67 90.81,6.67 90.81,9.21 R8.1
N$98
  Bottom 0.254: UART/GND.P1 94.93,8.57 94.61,8.89 94.61,13.65 R9.1
N$100  (via drill 0.61)
  Top 0.254: U$21.4 12.7,52.7 12.7,45.4 13.34,45.4 15.24,43.5 v33.02,43.5 | v33.02,48.58 31.75,49.85 31.75,53.66 36.83,53.66 39.05,55.88 v77.15,55.88 | JP9.11 JP7.21
  Bottom 0.254: v33.02,48.58 v33.02,43.5 | v77.15,55.88 77.15,57.47 78.42,58.74 80.33,58.74 80.33,33.34 JP9.11
V_IN+
  Top 0.813: FQP30N06L.3 18.1,12.38 6.35,12.38 CHARGE_IN.P1

## Text on the board
tPlace: ELFKIN TEST PCB / REV A / EJW | GDS
tSilk: R LEG (BROWN)